# EAGLE board 555_project_analog_swu_board_revA (EAGLE 7.6.0)
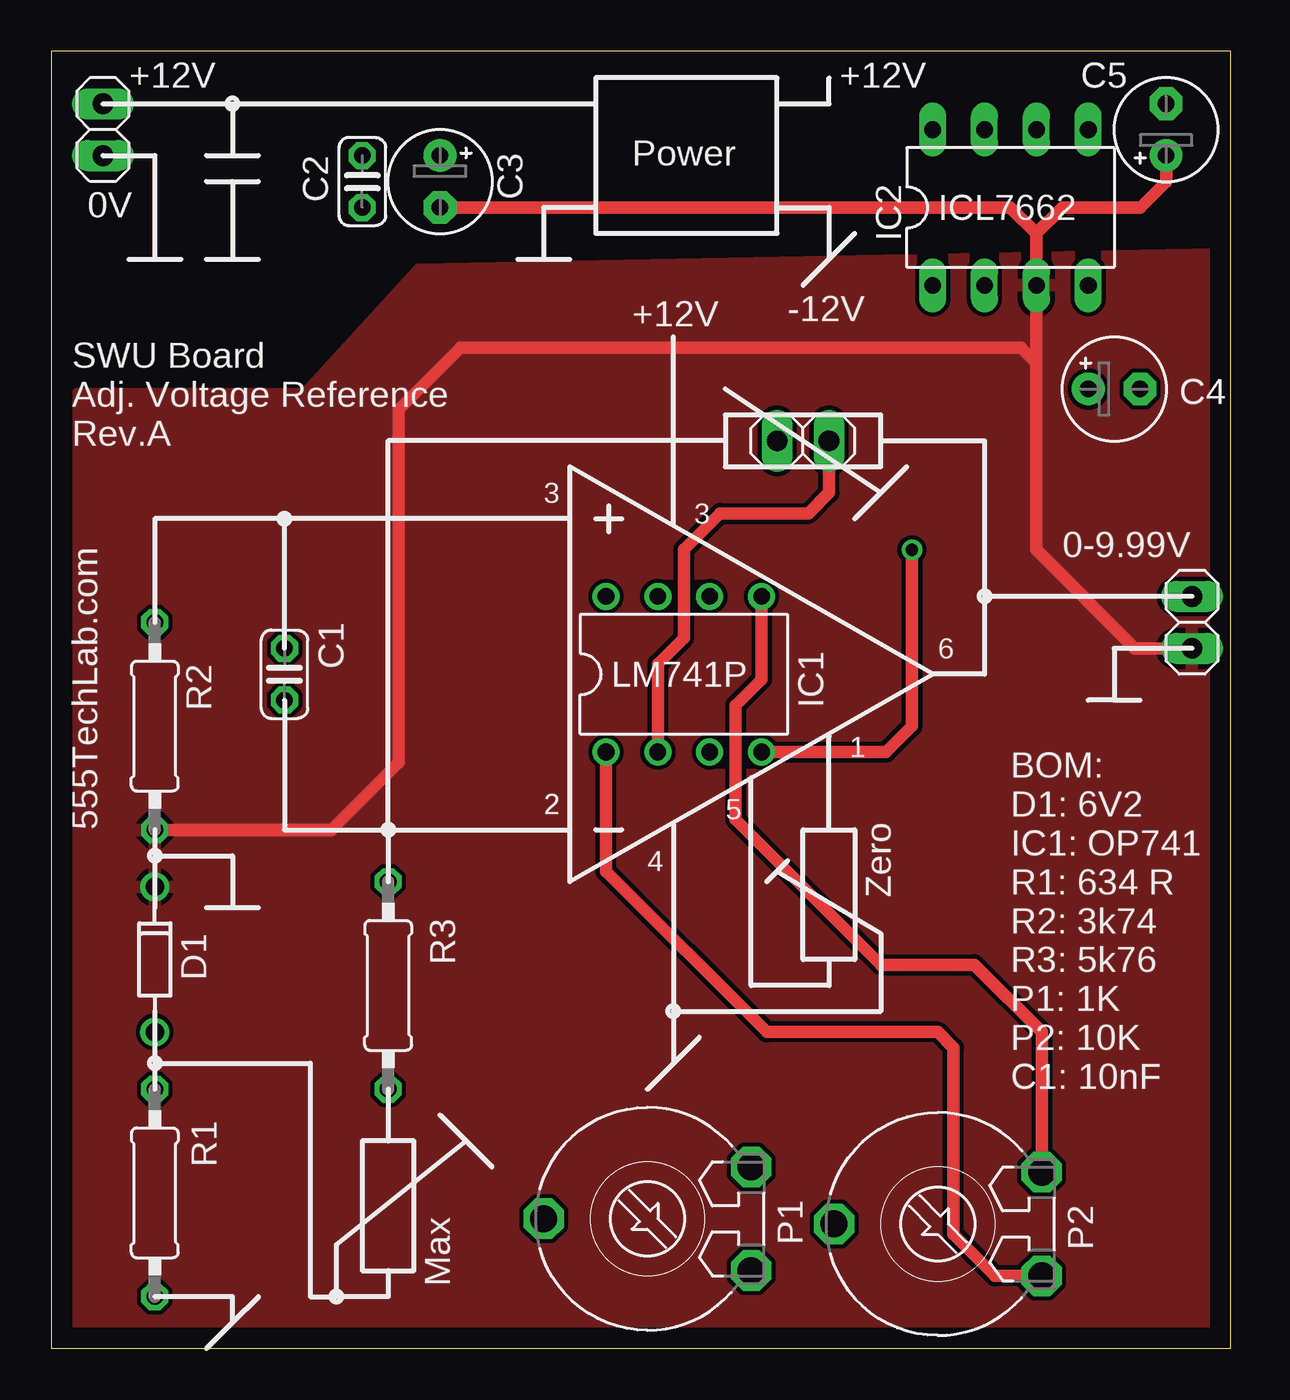
[diagram p0: board, top side]
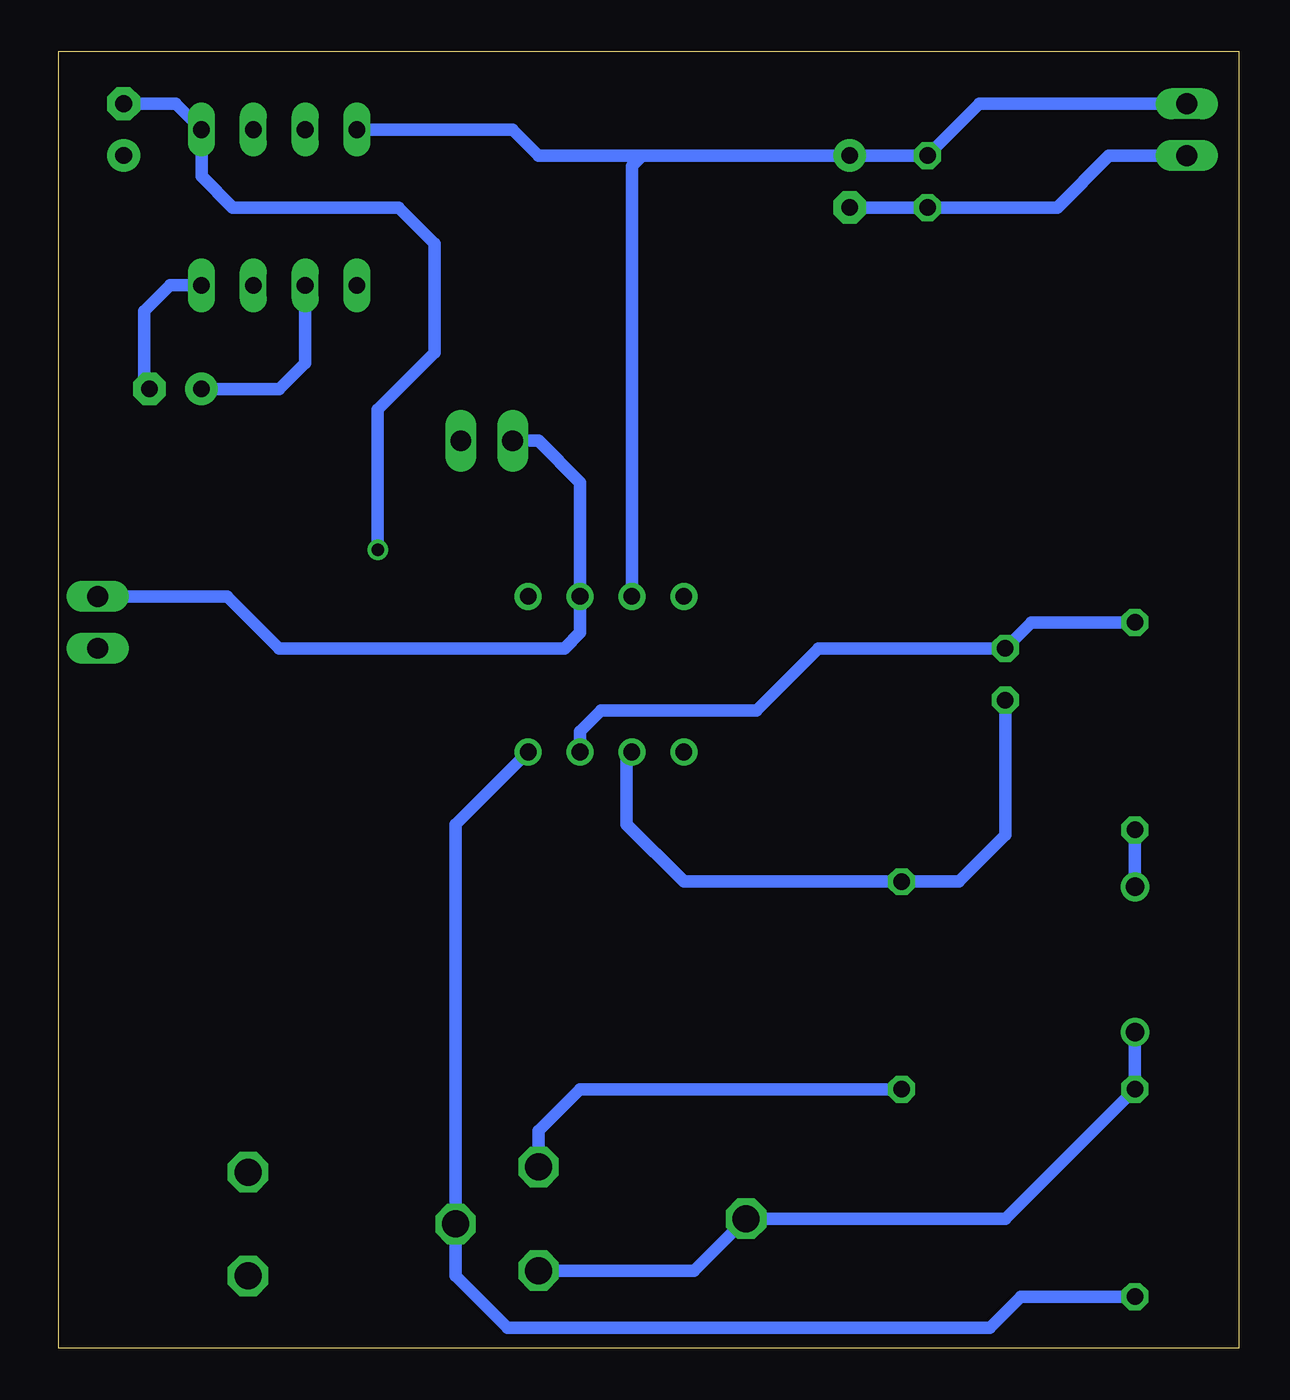
[diagram p1: board, bottom side, seen from below]

Size 57.78 x 63.54 mm. Coordinates in mm from the lower left corner, seen from the top.
Outline: 0,0 57.78,0 57.78,63.54 0,63.54 0,0
Copper layers (1*16): Top 0.035mm / dielectric 1.5mm / Bottom 0.035mm
Design rules "default": minimum track width 10mil, minimum drill 24mil, track to track 8mil, track to pad 8mil, pad to pad 8mil, via to via 8mil, smd to smd 8mil, copper to edge 40mil, drill to drill 8mil, minimum pad ring 10mil, minimum via ring 8mil, stop-mask expansion 4mil, vias tented up to drill 0mil, thermal gap 10mil

## Footprints (pad centres in the part's own frame; a part is rotated, then mirrored left to right if it is on the bottom)
C025-024X044 = drill 0.813 octagon: 1 -1.27,0; 2 1.27,0
E2,5-5 = drill 0.813 pad 1.6: + -1.27,0 | drill 0.813 pad 1.6 octagon: - 1.27,0
DIODE-ZENER = drill 0.9: P$1 -3.556,0; P$2 3.556,0
DIL08 = drill 0.813 pad 1.27: 1 -3.81,-3.81; 2 -1.27,-3.81; 3 1.27,-3.81; 4 3.81,-3.81; 5 3.81,3.81; 6 1.27,3.81; 7 -1.27,3.81; 8 -3.81,3.81
DIL08' = drill 0.813 long: 1 -3.81,-3.81; 2 -1.27,-3.81; 3 1.27,-3.81; 4 3.81,-3.81; 5 3.81,3.81; 6 1.27,3.81; 7 -1.27,3.81; 8 -3.81,3.81
1X02 = drill 1.016 long: 1 -1.27,0; 2 1.27,0
LI10 = drill 1.321 octagon: A -2.54,-5.08; E 2.54,-5.08; S 0,5.08
0207/10 = drill 0.813 octagon: 1 -5.08,0; 2 5.08,0

## Placement (x,y rotation side)
C1  [C025-024X044]  11.43,33.02 270 top
C2  100nF  [C025-024X044]  15.24,57.15 270 top
C3  10uF  [E2,5-5]  19.05,57.15 270 top
C4  10uF  [E2,5-5]  52.07,46.99 0 top
C5  10uF  [E2,5-5]  54.61,59.69 90 top
D1  DIODE-ZENERPTH  [DIODE-ZENER]  5.08,19.05 270 top
IC1  LM741P  [DIL08]  30.99,33.02 0 top
IC2  ICL7662  [DIL08']  46.99,55.88 0 top
K1  [1X02]  2.54,59.69 270 top
K3  Codschalter  [1X02]  36.83,44.45 180 top
K5  0-9.99V  [1X02]  55.88,35.56 270 top
P1  Max.  [LI10]  29.21,6.35 90 top
P2  Zero  [LI10]  43.43,6.1 90 top
R1  [0207/10]  5.08,7.62 270 top
R2  [0207/10]  5.08,30.48 270 top
R3  [0207/10]  16.51,17.78 270 top

## Library data of the parts
C1-C5 R1-R3 = resistor
D1 = SparkFun-DiscreteSemi
IC1 = linear
IC2 = maxim; MF: INTERSIL; MPN: ICL7660CPA; OC_FARNELL: 1018170; OC_NEWARK: 06F7441
K1 K3 K5 = pinhead
P1 P2 = pot

## Nets
0: IC1.6 K3.2 K5.1
+12V: C2.1 C3.+ IC1.7 IC2.8 K1.1
-12V: C5.- IC1.4 IC2.5 P2.S R1.2
C: C1.2 IC1.2 K3.1 R3.1
GND: C2.2 C3.- C5.+ D1.P$1 IC2.3 K1.2 K5.2 R2.2
N$4: IC1.1 P2.A
N$5: IC1.5 P2.E
N$6: C1.1 IC1.3 R2.1
N$7: P1.E R3.2
N$8: D1.P$2 P1.A P1.S R1.1
N$9: C4.+ IC2.2
N$10: C4.- IC2.4

## Tracks (layer width: path | path; a pad name or v marks a point on that pad's centre or on a via)
0
  Bottom 0.61: K3.2 34.29,44.45 32.26,42.42 IC1.6 32.26,35.05 33.02,34.29 46.99,34.29 49.53,36.83 K5.1
+12V
  Bottom 0.61: K1.1 12.7,60.96 C2.1 C3.+ 29.21,58.42 | 29.21,58.42 34.29,58.42 35.56,59.69 IC2.8 | IC1.7 29.72,57.91 29.21,58.42
-12V  (via drill 0.6)
  Top 0.61: IC1.4 40.89,29.21 42.16,30.48 v42.16,39.12
  Bottom 0.61: R1.2 10.67,2.54 12.19,1.02 35.81,1.02 38.35,3.56 P2.S 38.35,25.65 IC1.4 | C5.- 52.07,60.96 IC2.5 50.8,57.4 49.28,55.88 41.15,55.88 39.37,54.1 39.37,48.77 42.16,45.97 v42.16,39.12
C
  Top 0.61: IC1.2 29.72,33.53 30.99,34.8 30.99,39.12 32.77,40.89 37.08,40.89 38.1,41.91 K3.1
  Bottom 0.61: C1.2 11.43,25.15 13.72,22.86 R3.1 27.18,22.86 29.97,25.65 29.97,28.96 IC1.2
GND
  Top 0.61: C3.- 46.99,55.88 48.26,54.61 | 48.26,54.61 IC2.3 48.26,48.26 | C5.+ 54.61,57.15 53.34,55.88 49.53,55.88 48.26,54.61 | K5.2 53.09,34.29 48.26,39.12 48.26,48.26 | R2.2 13.72,25.4 17.02,28.7 17.02,45.97 20.07,49.02 47.5,49.02 48.26,48.26
  Bottom 0.61: K1.2 6.35,58.42 8.89,55.88 C2.2 C3.- | D1.P$1 R2.2
  pour Top: 57.15,53.59 18.03,52.83 12.45,46.74 1.27,46.74 1.02,1.02 56.64,0.51
N$4
  Top 0.61: P2.A 46.23,3.56 44.2,5.59 44.2,14.73 43.43,15.49 35.05,15.49 27.18,23.37 IC1.1
N$5
  Top 0.61: IC1.5 34.8,32.77 33.53,31.5 33.53,25.91 40.64,18.8 45.21,18.8 48.51,15.49 P2.E
N$6
  Bottom 0.61: R2.1 10.16,35.56 C1.1 20.57,34.29 23.62,31.24 31.24,31.24 32.26,30.23 IC1.3
N$7
  Bottom 0.61: R3.2 32.26,12.7 34.29,10.67 P1.E
N$8
  Bottom 0.61: D1.P$2 R1.1 11.43,6.35 P1.S 26.67,3.81 P1.A
N$9
  Bottom 0.61: C4.+ 46.99,46.99 45.72,48.26 IC2.2
N$10
  Bottom 0.61: IC2.4 52.32,52.07 53.59,50.8 53.59,47.24 C4.-

## Text on the board
tPlace: +12V | +12V | Power | 0V | +12V | -12V | SWU Board / Adj. Voltage Reference / Rev.A | 3 | 3 | 6 | 1 | 2 | 2 | 5 | 555TechLab.com | 4 | Zero | BOM: / D1: 6V2 / IC1: OP741 / R1: 634 R / R2: 3k74 / R3: 5k76 / P1: 1K / P2: 10K / C1: 10nF | Max